# EAGLE board pneuBoard_rev2 (EAGLE 6.6.0)
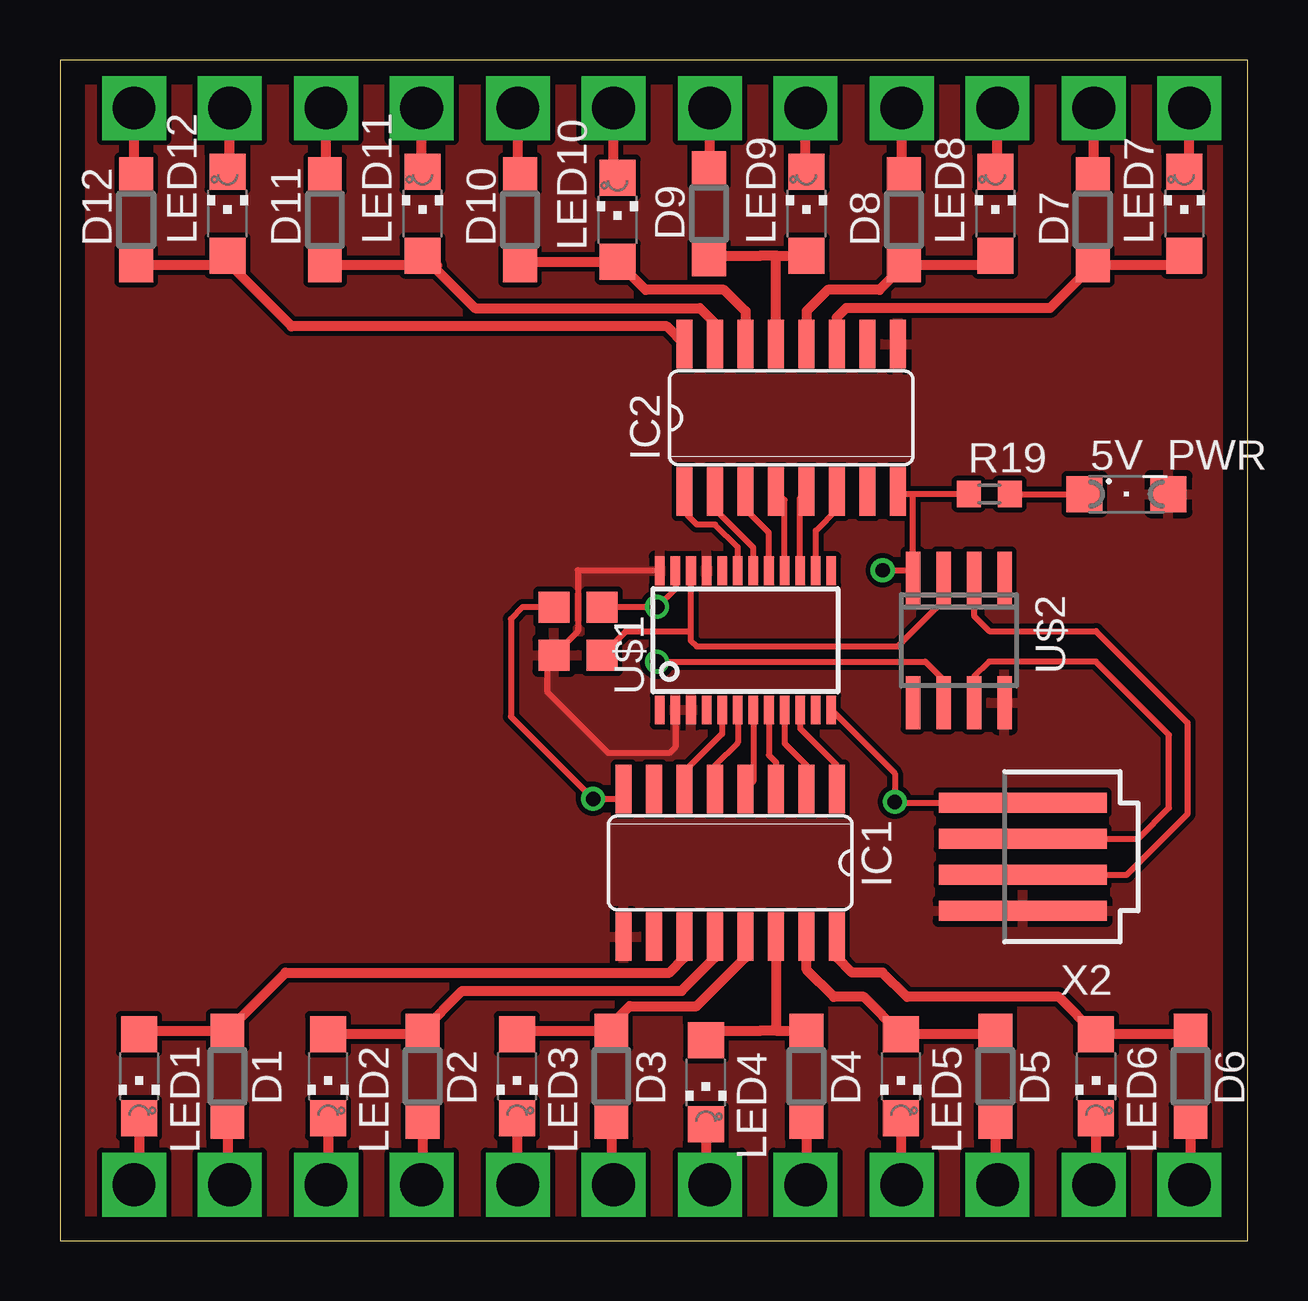
[diagram p0: board, top side]
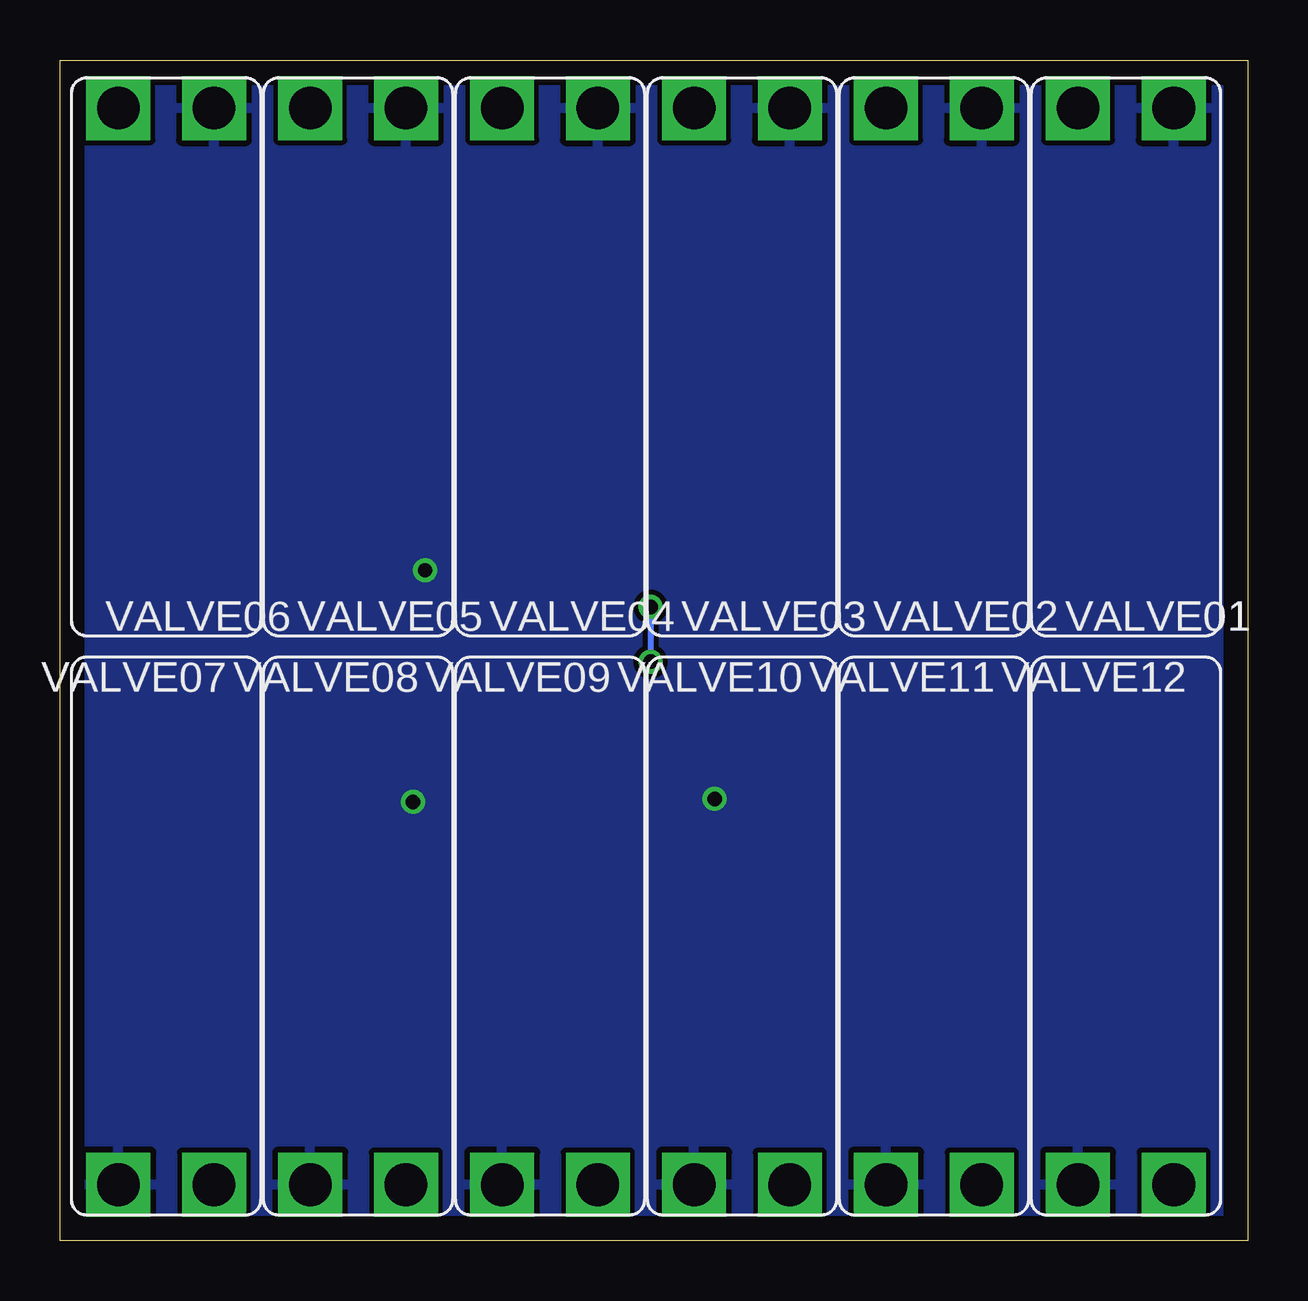
[diagram p1: board, bottom side, seen from below]

Size 49.51 x 49.2 mm. Coordinates in mm from the lower left corner, seen from the top.
Outline: 0,0 49.51,0 49.51,49.2 0,49.2 0,0
Copper layers (1*16): Top 0.035mm / dielectric 1.5mm / Bottom 0.035mm
Design rules "default": minimum track width 10mil, minimum drill 24mil, track to track 8mil, track to pad 8mil, pad to pad 8mil, via to via 8mil, smd to smd 8mil, copper to edge 40mil, drill to drill 8mil, minimum pad ring 10mil, minimum via ring 8mil, stop-mask expansion 4mil, vias tented up to drill 0mil, thermal gap 10mil

## Footprints (pad centres in the part's own frame; a part is rotated, then mirrored left to right if it is on the bottom)
SML1206 = smd 1.5 x 1.5: A 1.75,0; C -1.75,0
SOD123 = smd 1.4 x 1.4: A 1.9,0; C -1.9,0
SO16 = smd 0.66 x 2.032: 1 -4.445,-3.073; 2 -3.175,-3.073; 3 -1.905,-3.073; 4 -0.635,-3.073; 5 0.635,-3.073; 6 1.905,-3.073; 7 3.175,-3.073; 8 4.445,-3.073; 9 4.445,3.073; 10 3.175,3.073; 11 1.905,3.073; 12 0.635,3.073; 13 -0.635,3.073; 14 -1.905,3.073; 15 -3.175,3.073; 16 -4.445,3.073
CHIPLED_1206 = smd 1.5 x 1.5: A 0,-1.75; C 0,1.75
R0603 = smd 1 x 1.1: 1 -0.85,0; 2 0.85,0
PW_R-PDSO-G24 = smd 0.4 x 1.2: 1 -3.575,-2.9; 2 -2.925,-2.9; 3 -2.275,-2.9; 4 -1.625,-2.9; 5 -0.975,-2.9; 6 -0.325,-2.9; 7 0.325,-2.9; 8 0.975,-2.9; 9 1.625,-2.9; 10 2.275,-2.9; 11 2.925,-2.9; 12 3.575,-2.9; 13 3.575,2.9; 14 2.925,2.9; 15 2.275,2.9; 16 1.625,2.9; 17 0.975,2.9; 18 0.325,2.9; 19 -0.325,2.9; 20 -0.975,2.9; 21 -1.625,2.9; 22 -2.275,2.9; 23 -2.925,2.9; 24 -3.575,2.9
SO8 = smd 0.6 x 2.2: 1 -1.905,-2.6; 2 -0.635,-2.6; 3 0.635,-2.6; 4 1.905,-2.6; 5 1.905,2.6; 6 0.635,2.6; 7 -0.635,2.6; 8 -1.905,2.6
MS5837-30BA = smd 1.3 x 1.3: 1 -1,1; 2 -1,-1; 3 1,-1; 4 1,1
X-SERIES = drill 1.778 square: P1 10.363,1.994; P2 10.363,-1.994
87438-04 = smd 7 x 0.85: 1 0,2.25; 2 0,0.75; 3 0,-0.75; 4 0,-2.25

## Placement (x,y rotation side)
5V_PWR  [SML1206]  44.45,31.11 0 top
D1  [SOD123]  6.99,6.86 270 top
D2  [SOD123]  15.11,6.86 270 top
D3  [SOD123]  22.99,6.86 270 top
D4  [SOD123]  31.11,6.86 270 top
D5  [SOD123]  38.99,6.86 270 top
D6  [SOD123]  47.12,6.86 270 top
D7  [SOD123]  43.05,42.55 90 top
D8  [SOD123]  35.18,42.55 90 top
D9  [SOD123]  27.05,42.8 90 top
D10  [SOD123]  19.18,42.55 90 top
D11  [SOD123]  11.05,42.55 90 top
D12  [SOD123]  3.17,42.55 90 top
IC1  ULN2001AD  [SO16]  27.94,15.75 180 top
IC2  ULN2001AD  [SO16]  30.48,34.29 0 top
LED1  [CHIPLED_1206]  3.3,6.86 180 top
LED2  [CHIPLED_1206]  11.18,6.86 180 top
LED3  [CHIPLED_1206]  19.05,6.86 180 top
LED4  [CHIPLED_1206]  26.92,6.6 180 top
LED5  [CHIPLED_1206]  35.05,6.86 180 top
LED6  [CHIPLED_1206]  43.18,6.86 180 top
LED7  [CHIPLED_1206]  46.86,42.8 0 top
LED8  [CHIPLED_1206]  38.99,42.8 0 top
LED9  [CHIPLED_1206]  31.11,42.8 0 top
LED10  [CHIPLED_1206]  23.24,42.55 0 top
LED11  [CHIPLED_1206]  15.11,42.8 0 top
LED12  [CHIPLED_1206]  6.99,42.8 0 top
R19  1k  [R0603]  38.73,31.11 0 top
U$1  PCF8575C  [PW_R-PDSO-G24]  28.57,25.02 0 top
U$2  P82B715  [SO8]  37.47,25.02 180 top
U$3  MS5837-30BA  [MS5837-30BA]  21.59,25.4 0 top
VALVE01  X-5-XX-L-F  [X-SERIES]  5.08,12.7 270 bottom
VALVE02  X-5-XX-L-F  [X-SERIES]  13.08,12.7 270 bottom
VALVE03  X-5-XX-L-F  [X-SERIES]  21.08,12.7 270 bottom
VALVE04  X-5-XX-L-F  [X-SERIES]  29.08,12.7 270 bottom
VALVE05  X-5-XX-L-F  [X-SERIES]  37.08,12.7 270 bottom
VALVE06  X-5-XX-L-F  [X-SERIES]  45.09,12.7 270 bottom
VALVE07  X-5-XX-L-F  [X-SERIES]  45.09,36.83 90 bottom
VALVE08  X-5-XX-L-F  [X-SERIES]  37.08,36.83 90 bottom
VALVE09  X-5-XX-L-F  [X-SERIES]  29.08,36.83 90 bottom
VALVE10  X-5-XX-L-F  [X-SERIES]  21.08,36.83 90 bottom
VALVE11  X-5-XX-L-F  [X-SERIES]  13.08,36.83 90 bottom
VALVE12  X-5-XX-L-F  [X-SERIES]  5.08,36.83 90 bottom
X2  87438-04  [87438-04]  40.13,16 180 top

## Library data of the parts
5V_PWR LED1-LED12 = led
D1-D12 = diode
IC1 IC2 = uln-udn
R19 = resistor
U$1 = texas
U$2 = nxp
U$3 = te_connectivity
VALVE01-VALVE09 VALVE10-VALVE12 = ParkerFludics
X2 = con-molex_MOD; OC_FARNELL: unknown; OC_NEWARK: unknown

## Nets
5V: 5V_PWR.A IC1.9 IC2.9 U$1.2 U$1.3 U$1.21 U$1.24 U$2.8 U$3.2 X2.1
5V_LED: 5V_PWR.C R19.2
GND: D1.A D2.A D3.A D4.A D5.A D6.A D7.A D8.A D9.A D10.A D11.A D12.A IC1.8 IC2.8 R19.1 U$1.12 U$2.4 U$3.1 VALVE01.P2 VALVE02.P2 VALVE03.P2 VALVE04.P2 VALVE05.P2 VALVE06.P2 VALVE07.P2 VALVE08.P2 VALVE09.P2 VALVE10.P2 VALVE11.P2 VALVE12.P2 X2.4
INT: U$1.1
N$1: LED1.C VALVE01.P1
N$2: LED3.C VALVE03.P1
N$3: LED4.C VALVE04.P1
N$4: LED5.C VALVE05.P1
N$5: LED6.C VALVE06.P1
N$6: LED9.C VALVE09.P1
N$13: LED2.C VALVE02.P1
N$14: LED8.C VALVE08.P1
N$15: LED7.C VALVE07.P1
N$16: LED10.C VALVE10.P1
N$17: LED11.C VALVE11.P1
N$18: LED12.C VALVE12.P1
P00: U$1.4
P01: IC1.6 U$1.5
P01_BUF: D1.C IC1.11 LED1.A
P02: IC1.5 U$1.6
P02_BUF: D2.C IC1.12 LED2.A
P03: IC1.4 U$1.7
P03_BUF: D3.C IC1.13 LED3.A
P04: IC1.3 U$1.8
P04_BUF: D4.C IC1.14 LED4.A
P05: IC1.2 U$1.9
P05_BUF: D5.C IC1.15 LED5.A
P06: IC1.1 U$1.10
P06_BUF: D6.C IC1.16 LED6.A
P07: U$1.11
P10: U$1.13
P11: IC2.6 U$1.14
P11_BUF: D7.C IC2.11 LED7.A
P12: IC2.5 U$1.15
P12_BUF: D8.C IC2.12 LED8.A
P13: IC2.4 U$1.16
P13_BUF: D9.C IC2.13 LED9.A
P14: IC2.3 U$1.17
P14_BUF: D10.C IC2.14 LED10.A
P15: IC2.2 U$1.18
P15_BUF: D11.C IC2.15 LED11.A
P16: IC2.1 U$1.19
P16_BUF: D12.C IC2.16 LED12.A
P17: U$1.20
SCL: U$1.22 U$2.3 U$3.3
SCL_BUF: U$2.2 X2.2
SDA: U$1.23 U$2.6 U$3.4
SDA_BUF: U$2.7 X2.3

## Tracks (layer width: path | path; a pad name or v marks a point on that pad's centre or on a via)
5V
  Top 0.254: U$1.24 21.61,27.92 21.59,27.94 21.59,25.4 U$3.2 20.32,24.13 20.32,22.86 22.86,20.32 25.4,20.32 25.65,20.57 U$1.2
  pour Top: 0,49.53 0,0 54.61,0 54.61,49.53
5V_LED
  Top 0.254: R19.2 5V_PWR.C
GND  (via drill 0.6)
  Top 0.254: U$2.4 35.56,27.94 | 35.56,27.94 35.56,31.11 | R19.1 35.56,31.11 | 35.56,31.11 35.03,31.11 IC2.8 | IC1.8 23.39,18.41 v22.23,18.41 18.8,21.84 18.8,25.91 19.29,26.4 U$3.1 | v34.29,27.94 35.56,27.94 | U$1.12 34.8,19.47 v34.8,18.29 34.83,18.25 X2.4
  Top 0.406: D12.A 3.09,44.53 VALVE12.P2 | D8.A 35.09,44.53 VALVE08.P2 | D11.A 11.09,44.45 VALVE11.P2 | D10.A 19.09,44.45 VALVE10.P2 | D7.A 43.09,44.48 VALVE07.P2 | D9.A 27.09,44.74 VALVE09.P2 | D1.A 6.99,2.34 VALVE01.P2 | D2.A 15.11,2.34 VALVE02.P2 | D3.A 22.99,2.34 VALVE03.P2 | D4.A 31.11,2.34 VALVE04.P2 | D5.A 38.99,2.34 VALVE05.P2 | D6.A 47.12,2.34 VALVE06.P2
  pour Bottom: 0,49.53 0,0 53.34,0 53.34,49.53
N$1
  Top 0.406: LED1.C 3.3,2.34 VALVE01.P1
N$2
  Top 0.406: LED3.C 19.05,2.34 VALVE03.P1
N$3
  Top 0.406: LED4.C 26.92,2.34 VALVE04.P1
N$4
  Top 0.406: LED5.C 35.05,2.34 VALVE05.P1
N$5
  Top 0.406: LED6.C 43.18,2.34 VALVE06.P1
N$6
  Top 0.406: LED9.C 31.08,44.59 VALVE09.P1
N$13
  Top 0.406: LED2.C 11.18,2.34 VALVE02.P1
N$14
  Top 0.406: LED8.C 39.08,44.38 VALVE08.P1
N$15
  Top 0.406: LED7.C 47.08,44.77 VALVE07.P1
N$16
  Top 0.406: LED10.C 23.08,44.55 VALVE10.P1
N$17
  Top 0.406: LED11.C 15.07,44.55 VALVE11.P1
N$18
  Top 0.406: LED12.C 7.07,44.38 VALVE12.P1
P01
  Top 0.254: U$1.5 27.6,21.12 26.04,19.56 IC1.6
P01_BUF
  Top 0.406: LED1.A 3.45,8.76 D1.C 9.4,11.18 25.4,11.18 26.04,11.81 IC1.11
P02
  Top 0.254: U$1.6 28.25,20.76 27.3,19.81 IC1.5
P02_BUF
  Top 0.406: IC1.12 27.3,11.81 25.91,10.41 16.77,10.41 D2.C 14.96,8.61 LED2.A
P03
  Top 0.254: U$1.7 28.9,19.15 IC1.4
P03_BUF
  Top 0.406: IC1.13 28.57,11.81 26.54,9.77 23.74,9.77 22.86,8.89 D3.C 19.2,8.76 LED3.A
P04
  Top 0.254: U$1.8 29.55,20.23 29.84,19.94 IC1.3
P04_BUF
  Top 0.406: LED4.A 26.92,8.76 29.21,8.76 29.84,8.76 | 29.84,8.76 D4.C | IC1.14 29.84,8.76
P05
  Top 0.254: U$1.9 30.2,20.73 31.11,19.81 IC1.2
P05_BUF
  Top 0.406: D5.C 38.84,8.61 LED5.A 33.5,10.16 32.26,10.16 31.11,11.3 IC1.15
P06
  Top 0.254: U$1.10 30.85,21.35 32.38,19.81 IC1.1
P06_BUF
  Top 0.406: D6.C 46.97,8.61 LED6.A 41.63,10.16 35.31,10.16 34.29,11.18 33.02,11.18 32.38,11.81 IC1.16
P11
  Top 0.254: U$1.14 31.5,29.59 32.38,30.48 IC2.6
P11_BUF
  Top 0.406: IC2.11 32.38,38.48 32.77,38.86 41.27,38.86 D7.C 46.71,40.65 LED7.A
P12
  Top 0.254: U$1.15 30.85,30.95 IC2.5
P12_BUF
  Top 0.406: IC2.12 31.11,38.73 32,39.62 34.16,39.62 D8.C 38.84,40.65 LED8.A
P13
  Top 0.254: U$1.16 30.2,30.86 IC2.4
P13_BUF
  Top 0.406: D9.C 27.2,41.05 29.21,41.05 29.84,41.05 | 29.84,41.05 LED9.A | IC2.13 29.84,41.05
P14
  Top 0.254: U$1.17 29.55,29.5 28.57,30.48 IC2.3
P14_BUF
  Top 0.406: IC2.14 28.57,38.73 27.69,39.62 24.41,39.62 LED10.A 19.33,40.8 D10.C
P15
  Top 0.254: U$1.18 28.9,28.89 27.3,30.48 IC2.2
P15_BUF
  Top 0.406: IC2.15 27.3,38.23 26.67,38.86 17.3,38.86 LED11.A 15.72,40.65 D11.C
P16
  Top 0.254: U$1.19 28.25,28.9 27.3,29.84 26.54,29.84 26.16,30.23 26.16,31.24 IC2.1
P16_BUF
  Top 0.406: IC2.16 25.3,38.1 9.65,38.1 6.99,40.77 LED12.A 6.83,40.65 D12.C
SCL
  Top 0.254: U$2.3 36.83,26.67 34.92,24.77 26.54,24.77 26.3,25.01 26.3,25.4 | 26.3,25.4 U$1.22 | U$3.3 23.59,25.4 26.3,25.4
SCL_BUF
  Top 0.254: U$2.2 38.1,26.04 38.73,25.4 43.18,25.4 46.99,21.59 46.99,17.78 44.45,15.24 40.14,15.24 X2.2
SDA  (via drill 0.6)
  Top 0.254: v24.89,24.13 36.07,24.13 36.83,23.37 U$2.6 | U$3.4 22.61,26.42 v24.89,26.42 25.65,27.17 U$1.23
  Bottom 0.254: v24.89,26.42 v24.89,24.13
SDA_BUF
  Top 0.254: U$2.7 38.1,23.5 38.73,24.13 43.18,24.13 46.23,21.08 46.23,18.03 44.95,16.75 X2.3